# Altium PCB ModbusYoRadio.PcbDoc
Units mm, origin at the board's own origin, x right, y up, seen from the top; angles counter-clockwise.
Board outline 100.08 x 100.05 mm, 2 copper layers (Top Layer, Bottom Layer); 47 components, 34 nets, 178 pads, 34 vias.
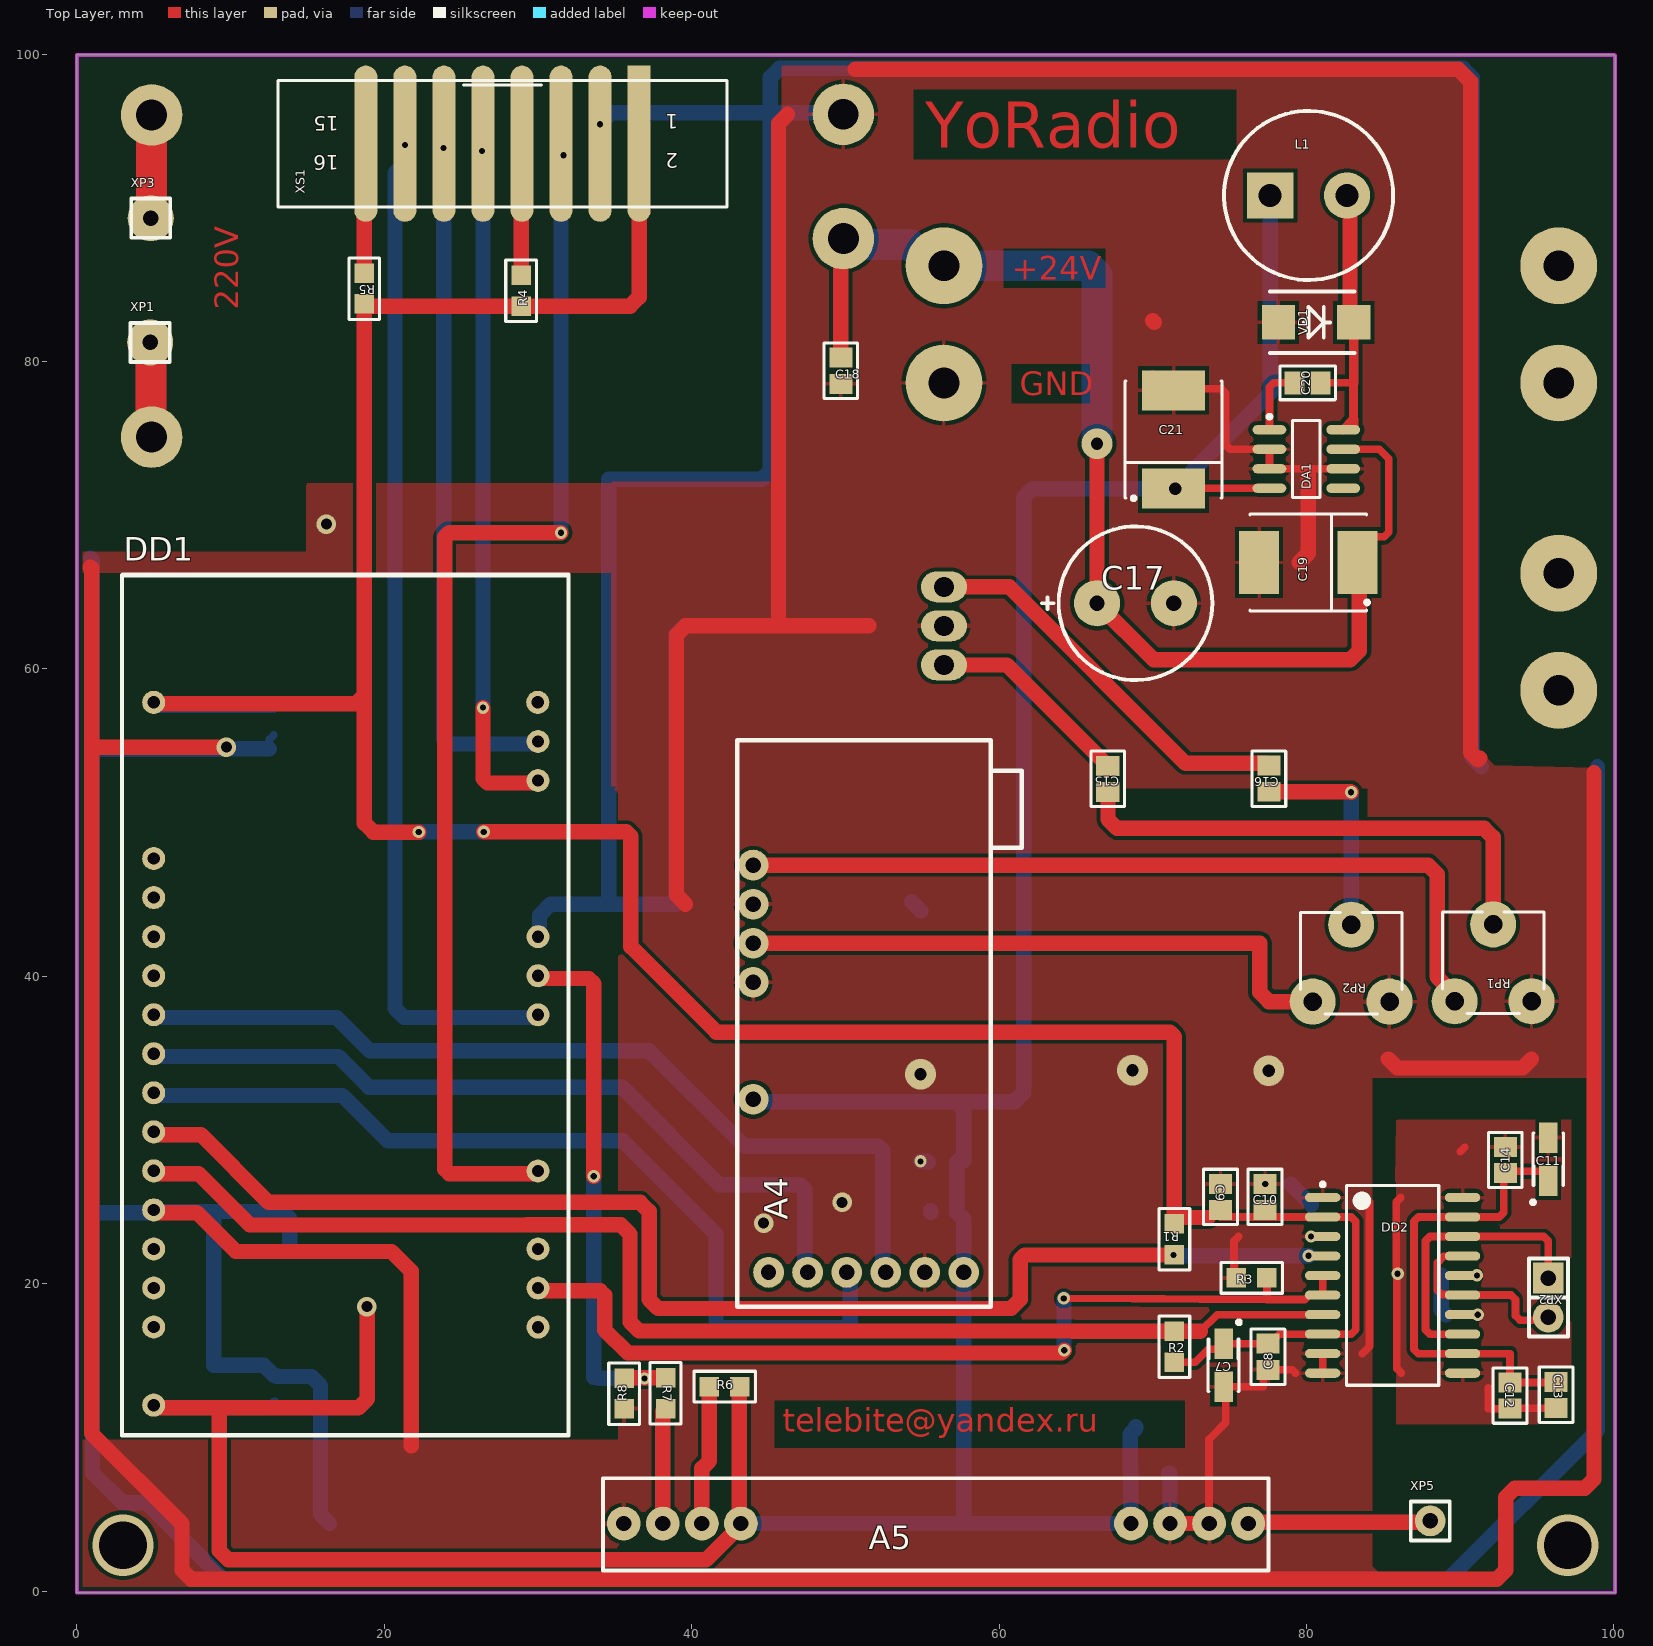
[diagram p0: Top Layer view]
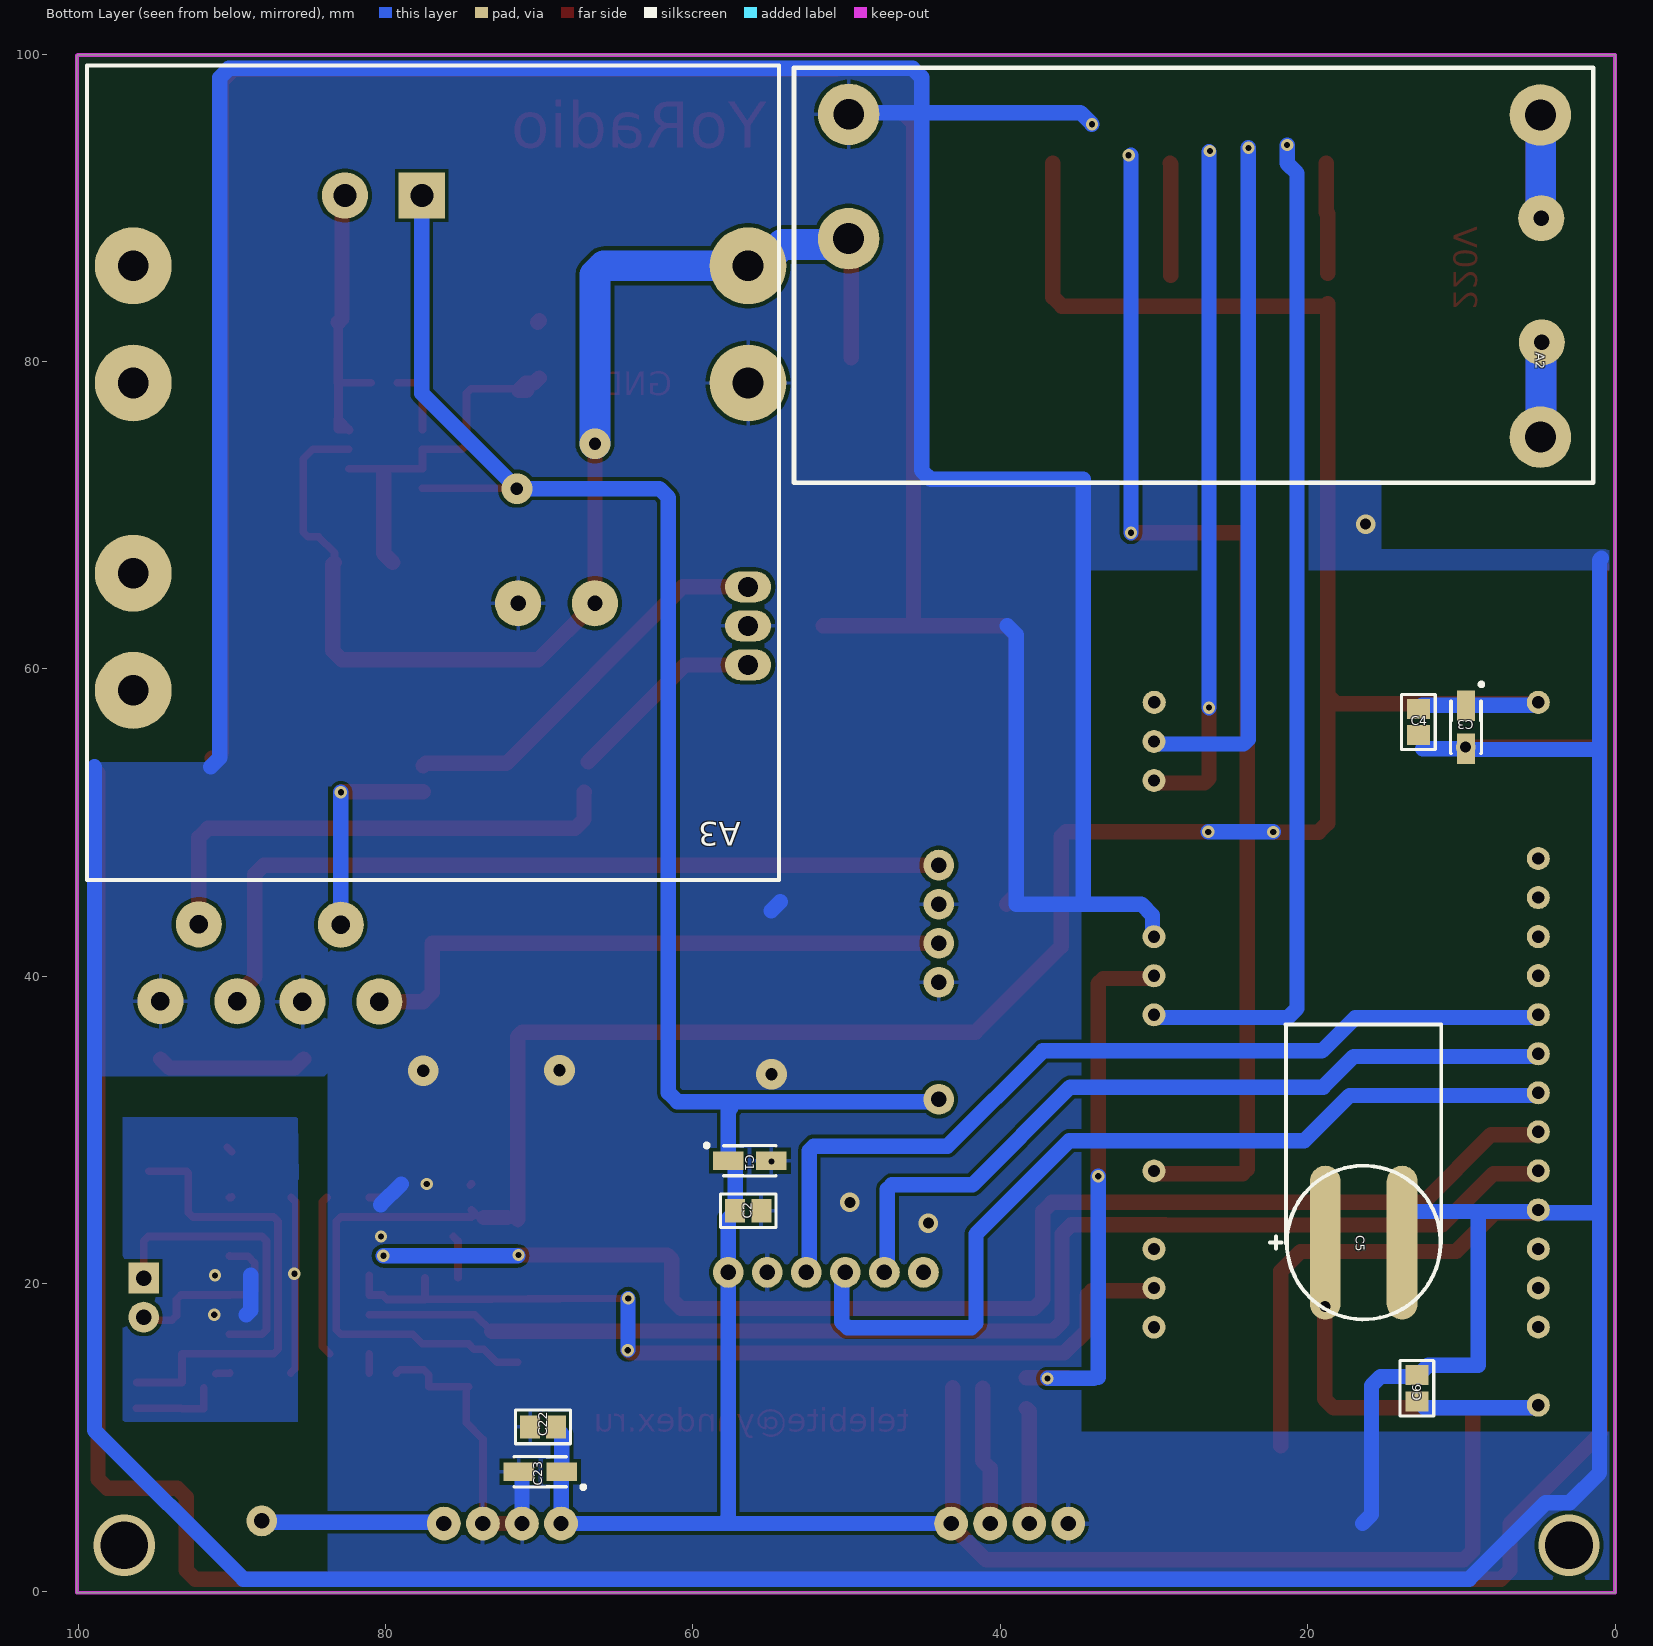
[diagram p1: Bottom Layer view, seen from below]
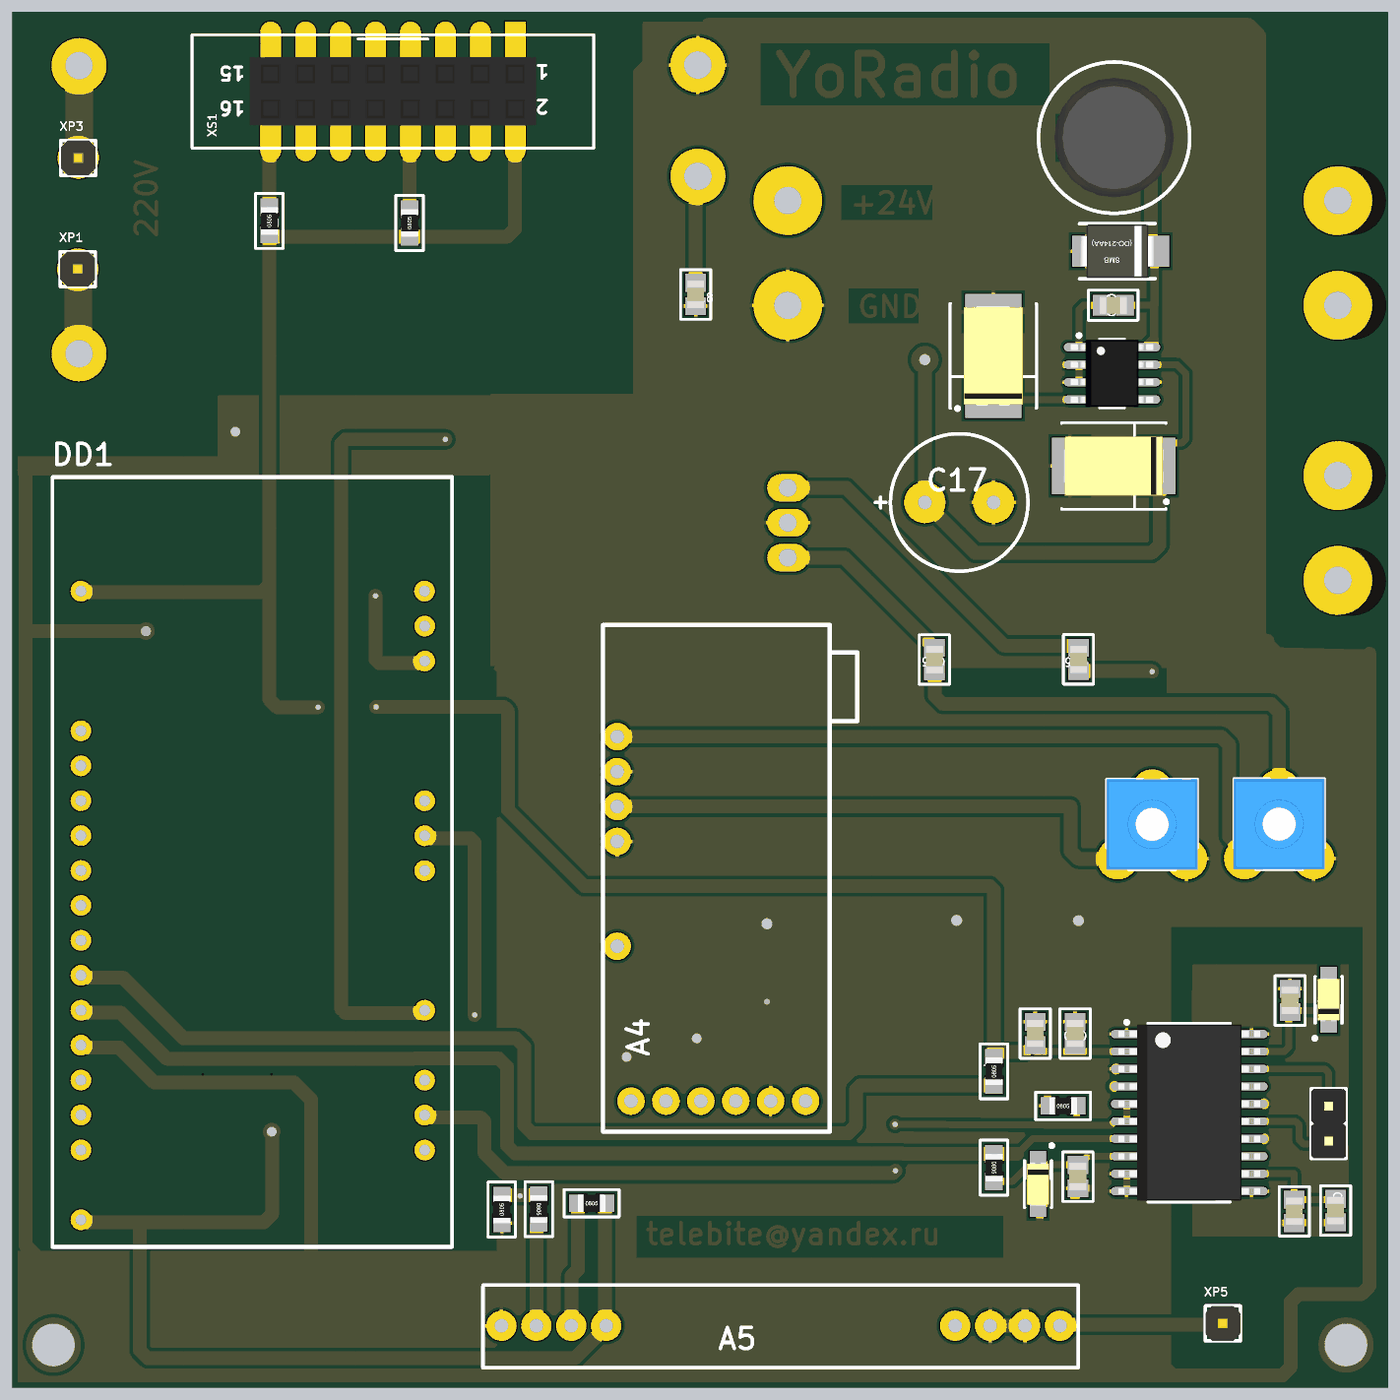
[diagram p2: 3D render of the assembled board from above, using the file's embedded part models]
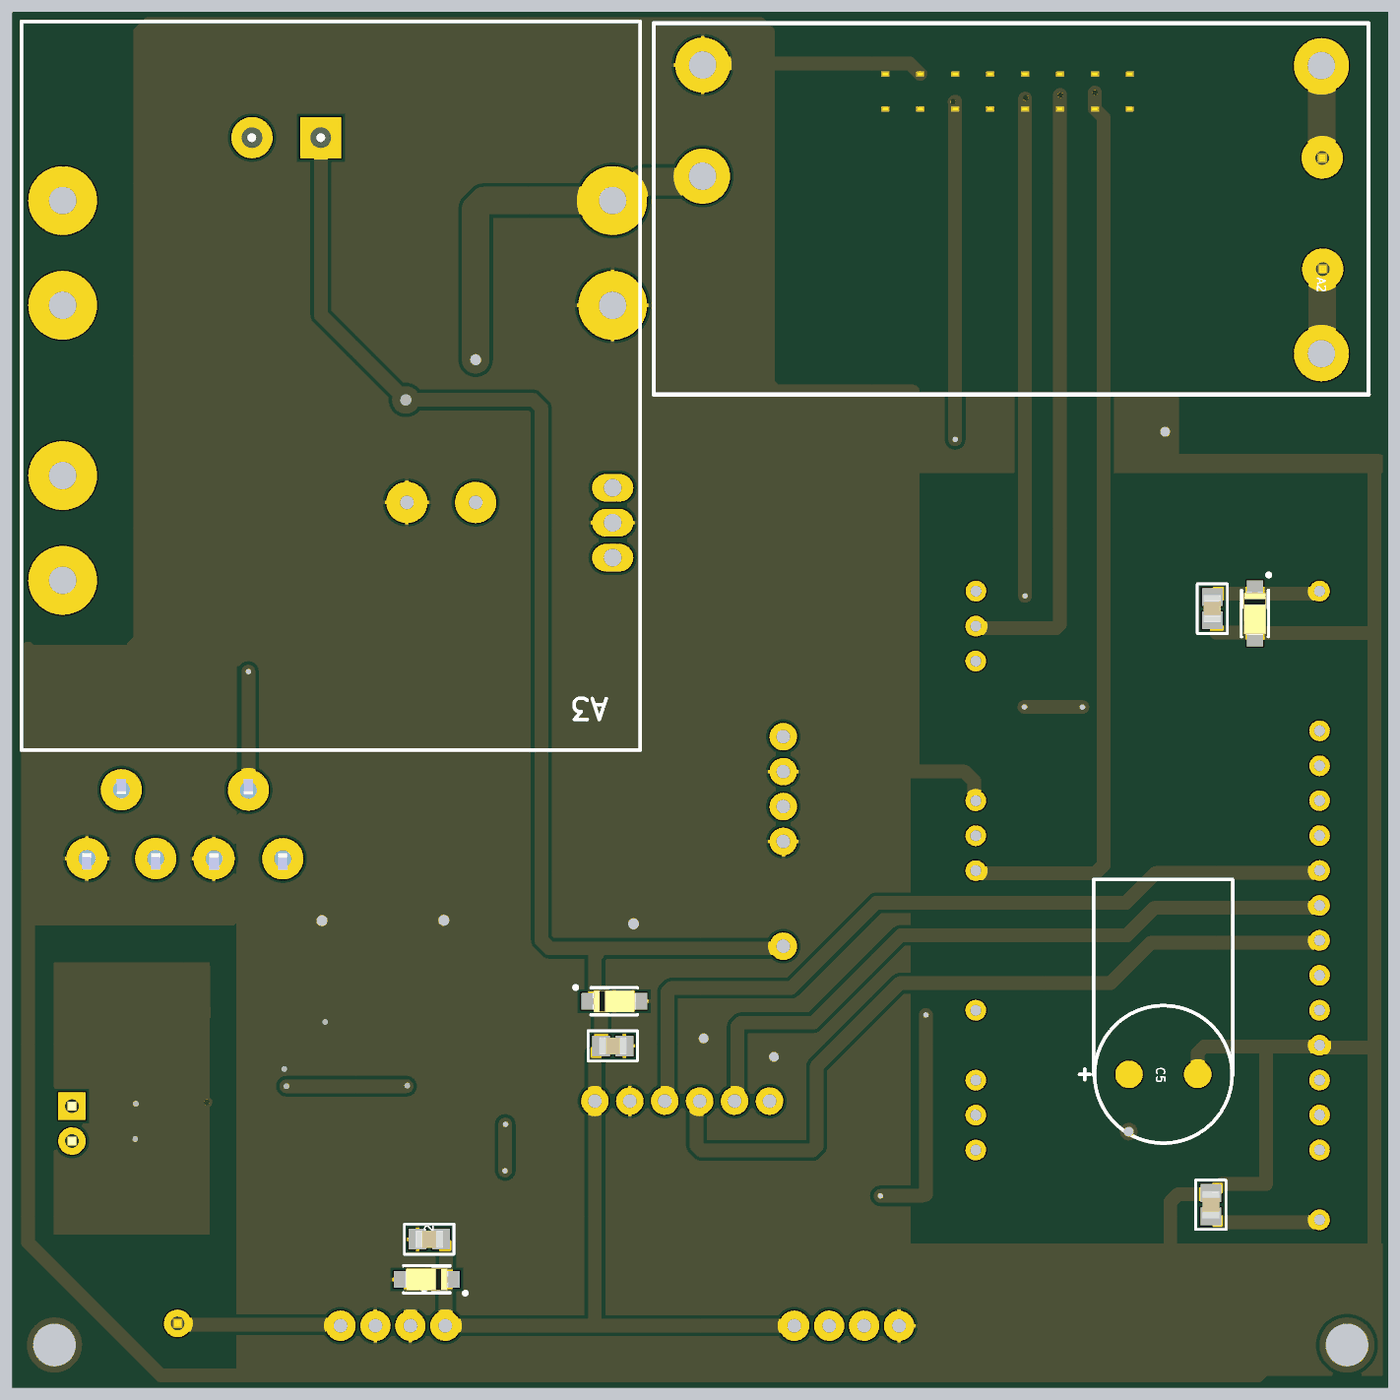
[diagram p3: 3D render of the assembled board from below, using the file's embedded part models]

## Layer stack, top to bottom
Top Solder: solder mask 0.0102, Solder Resist, Dk 3.5
Top Layer: signal copper 0.0356
Dielectric 1: dielectric 0.32, FR-4, Dk 4.8
Bottom Layer: signal copper 0.0356
Bottom Solder: solder mask 0.0102, Solder Resist, Dk 3.5

## Board outline
0,-0.1 0,99.951 100,99.951 100.076,99.9 100.076,-0.1

## Design rules (kind name [scope] priority, off if disabled: settings)
Clearance [All] p1: gap=0.254 ignorepadtopadclearanceinfootprint=FALSE
ComponentClearance [All] p1: gap=0 collisioncheckmode=3 verticalgap=0 showdistances=FALSE donotcheckwithout3dbody=TRUE
HoleSize [All] p1: absolutevalues=TRUE maxlimit=12.7 minlimit=0.3 maxpercent=80.000 minpercent=20.000
PolygonConnect [All] p1: thpad.connectstyle=Relief thpad.reliefconductorwidth=0.254 thpad.reliefentries=4 thpad.polygonreliefangle="90 Angle" thpad.airgapwidth=0.254 smdpad.connectstyle=Relief smdpad.reliefconductorwidth=0.254 smdpad.reliefentries=4 smdpad.polygonreliefangle="90 Angle" smdpad.airgapwidth=0.254 via.connectstyle=Direct via.reliefconductorwidth=0.254 via.reliefentries=4 via.polygonreliefangle="90 Angle" via.airgapwidth=0.254
RoutingCorners [All] p1: cornerstyle=90-Degree minsetback=2.54 maxsetback=2.54
RoutingVias [All] p1: holewidth=0.4 width=0.8 viastyle="Through Hole" minholewidth=0.3 minwidth=0.3 maxholewidth=12.7 maxwidth=50
SolderMaskExpansion [All] p1: expansion=0.102 istentingtop=FALSE
SupplyNets "Schematic Supply Nets" [InNet('GND')] p1: voltage=0.000
Width [All] p1: maxlimit=10 minlimit=0.25 preferedwidth=0.5
27 further rules are at their usual default settings.

## Components (designator, comment, footprint, x,y, rotation, side; value= is the part's Value field where it differs from the comment)
A2 "PWR220" PWR220_1 4.862,75.086 r0 bottom
A3 "UNH" UNH 96.406,66.229 r0 bottom locked
A4 "PCM5102" PCM5102 43.006,55.401 r270 top
A5 "RXB60" RXB60 77.52,7.346 r180 top locked
C1 "100 uF" TC3216-1206-A 56.3,28 r180 bottom
C2 "0.1uF" cap0805 56.4,24.75 r180 bottom
C3 "100 uF" TC3216-1206-A 9.7,56.2 r270 bottom
C4 "0.1uF" cap0805 12.8,56.55 r270 bottom
C5 "470uF" "ECR-EHR 10mm"#1 16.358,22.682 r180 bottom
C6 "0.1uF" cap0805 12.9,13.2 r90 bottom
C7 "6.8uF" TC3216-1206-A 74.6,14.7 r270 top
C8 "0.1uF" cap0805 77.5,15.25 r90 top
C9 "0.1uF" cap0805 74.4,25.65 r270 top
C10 "0.01uF" cap0805 77.3,25.65 r270 top
C11 "6.8uF" TC3216-1206-A 95.732,28.104 r90 top
C12 "0.1uF" cap0805 93.24,12.724 r270 top
C13 "0.1uF" cap0805 96.24,12.774 r270 top
C14 "0.01uF" cap0805 92.932,28.054 r90 top
C15 "2.2uF" cap0805 67.068,52.848 r90 top
C16 "2.2uF" cap0805 77.548,52.861 r90 top
C17 "470uF" "ECR-EHR 10mm"#2 68.872,64.274 r0 top
C18 "0.1uF" cap0805 49.7,79.4 r270 top
C19 "100uF" TC7360-2924-E 80.112,66.928 r180 top
C20 "0.01uF" cap0805 80.073,78.612 r0 top
C21 "100uF" TC7360-2924-E 71.349,74.929 r90 top
C22 "0.1uF" cap0805 69.748,10.693 r180 bottom
C23 "100 uF" TC3216-1206-A 69.926,7.772 r0 bottom
DA1 "LM2675M-5" SO-8 79.985,73.659 r0 top
DD1 "Wrover38" Wrover 4.998,12.105 r0 top
DD2 "ADM2587E" SO-20 85.6,19.9 r0 top
L1 "RLB0914-470KL" RLB0914 80.137,90.804 r0 top
R1 "4.7k" res0805 71.4,22.9 r90 top
R2 "4.7k" res0805 71.4,15.9 r270 top
R3 "1k" res0805 76.425,20.384 r0 top
R4 "100" res0805 28.9,84.6 r90 top
R5 "100" res0805 18.7,84.748 r90 top
R6 "100" res0805 42.139,13.31 r0 top
R7 "2.7k" res0805 38.3,12.884 r270 top
R8 "4.3k" res0805 35.603,12.857 r90 top
RP1 "10k" CA-6V 92.139,40.879 r180 top
RP2 "10k" CA-6V 82.9,40.86 r180 top
VD1 "10BQ060" SMB 80.62,82.549 r0 top
XP1 "PLS-1" PLS1#1 4.767,81.245 r0 top
XP2 "PLS-2" PLS2 95.733,19.101 r180 top
XP3 "PLS-1" PLS1#1 4.804,89.327 r0 top
XP5 "PLS-1" PLS1#2 88.047,4.571 r0 top
XS1 "PBD-16" PBD-16 27.69,94.17 r180 top locked

## Footprints (in the part's own frame and the unit in brackets; to place one, negate y for a bottom-side part, rotate by r counter-clockwise, add the part's x,y. Pads: shape width x height; smd on the part's side, far side on the other; paste and mask are expansions set on the pad)
CA-6V [mm]
  round 3 hole 1.2: 1(2.5,2.5) 2(0,-2.5) 3(-2.5,2.5)
  silkscreen extent -3.3,-3.3 3.3,3.3, body extent -3.3,-3.3 3.3,3.3, height 4.4
cap0805 [mm]
  rect 1.3x1.5 smd: 1(-0.85,0) 2(0.85,0)
  silkscreen extent -1.8,-1.1 1.8,1.1, body extent -1,-0.62 1,0.63, height 0.61
"ECR-EHR 10mm"#1 [mm] "HITANO ECR/EHR capacitor D=10mm"
  oval 2x10 / inner oval 2x10 / far side round 0 all layers, no hole: 1(-2.5,0) 2(2.5,0)
  silkscreen extent -6.1,-5 5,5
"ECR-EHR 10mm"#2 [mm] "HITANO ECR/EHR capacitor D=10mm"
  round 3 hole 1: 1(-2.5,0) 2(2.5,0)
  silkscreen extent -6.1,-5 5,5
PBD-16 [mm]
  rect 1.5x7.62 / inner rect 0x0 / far side rect 0x0 all layers, no hole: 1(-8.89,-1.27)
  oval 1.5x7.62 / inner round 0 / far side round 0 all layers, no hole: 2(-8.89,1.27) 3(-6.35,-1.27) 4(-6.35,1.27) 5(-3.81,-1.27) 6(-3.81,1.27) 7(-1.27,-1.27) 8(-1.27,1.27) 9(1.27,-1.27) 10(1.27,1.27) 11(3.81,-1.27) 12(3.81,1.27) 13(6.35,-1.27) 14(6.35,1.27) 15(8.89,-1.27)
  oval 1.5x7.62 / inner oval 1.5x7.62 / far side round 0 all layers, no hole: 16(8.89,1.27)
  silkscreen extent -14.6,-4.13 14.6,4.13, body extent -10.41,-2.5 10.41,2.5, height 8.5
PCM5102 [mm]
  round 2 hole 1: 1(34.661,14.694) 2(34.661,12.154) 3(34.661,9.614) 4(34.661,7.074) 5(34.661,4.534) 6(34.661,1.994) 7(23.401,0.994) 9(15.781,0.994) 10(13.241,0.994) 11(10.701,0.994) 12(8.161,0.994)
  silkscreen extent 0.03,-0.05 36.88,18.45
PLS1#1 [mm]
  round 3 hole 1: 1(0,0)
  silkscreen extent -1.27,-1.27 1.27,1.27, body extent -1.27,-1.27 1.27,1.27, height 8.44
PLS1#2 [mm]
  round 2 hole 1: 1(0,0)
  silkscreen extent -1.27,-1.27 1.27,1.27, body extent -1.27,-1.27 1.27,1.27, height 8.44
PLS2 [mm]
  rect 2x2 hole 1: 1(0,-1.27)
  round 2 hole 1: 2(0,1.27)
  silkscreen extent -1.27,-2.54 1.27,2.53, body extent -1.27,-2.54 1.27,2.54, height 8.54
PWR220_1 [mm]
  round 4 hole 2: 1(0,0) 2(0,-20.955) 3(45,-20.998) 4(45.008,-12.914)
  silkscreen extent -3.44,-24.04 48.57,2.96
res0805 [mm]
  rect 1.27x1.27 smd: 1(-1,0) 2(1,0)
  silkscreen extent -2,-1 2,1, body extent -1,-0.62 1,0.62, height 0.61
RLB0914 [mm]
  rect 3x3 hole 1.5: 1(-2.5,0)
  round 3 hole 1.5: 2(2.5,0)
  silkscreen extent -5.5,-5.5 5.5,5.5, body extent -4.35,-4.35 4.35,4.35, height 12.3
RXB60 [mm]
  round 2.2 hole 1: 1(1.321,2.946) 2(3.861,2.946) 3(6.401,2.946) 4(8.941,2.946) 5(34.32,2.946) 6(36.86,2.946) 7(39.4,2.946) 8(41.94,2.946)
  silkscreen extent 0,0 43.29,6
SMB [mm]
  rect 2.16x2.26 smd: 1(-2.45,0) 2(2.45,0)
  silkscreen extent -3,-2 2.5,2, body extent -3,-1.95 2.5,1.95, height 2.42
SO-8 [mm] "8-Pin Small Outline Integrated Circuit 1.27 mm Pitch, IPC Medium Density"
  oval 2.2x0.6 smd: 1(-2.4,1.905) 2(-2.4,0.635) 3(-2.4,-0.635) 4(-2.4,-1.905) 5(2.4,-1.905) 6(2.4,-0.635) 7(2.4,0.635) 8(2.4,1.905)
  silkscreen extent -2.52,-2.5 0.9,2.88, body extent -3,-2.45 3,2.45, height 1.6
SO-20 [mm] "20-Pin Small Outline Integrated Circuit (SOIC20), IPC Medium Density"
  oval 2.3x0.6 smd: 1(-4.55,5.715) 2(-4.55,4.445) 3(-4.55,3.175) 4(-4.55,1.905) 5(-4.55,0.635) 6(-4.55,-0.635) 7(-4.55,-1.905) 8(-4.55,-3.175) 9(-4.55,-4.445) 10(-4.55,-5.715) 11(4.55,-5.715) 12(4.55,-4.445) 13(4.55,-3.175) 14(4.55,-1.905) 15(4.55,-0.635) 16(4.55,0.635) 17(4.55,1.905) 18(4.55,3.175) 19(4.55,4.445) 20(4.55,5.715)
  silkscreen extent -4.67,-6.5 3,6.69, body extent -5.15,-6.41 5.16,6.41, height 2.48
TC3216-1206-A [mm] "Capacitor, SM Tantalum; Body 3.2 x 1.6 mm (LxW typ)"
  rect 2x1.2 smd: 1(-1.4,0) 2(1.4,0)
  silkscreen extent -2.93,-1 1.7,1.12, body extent -1.6,-0.8 1.6,0.8, height 1.62
TC7360-2924-E [mm] "Capacitor, SM Tantalum; Body 7.3 x 6.0 mm (LxW typ)"
  rect 2.6x4.1 smd: 1(-3.2,0) 2(3.2,0)
  silkscreen extent -3.95,-3.15 3.8,3.15, body extent -3.65,-2.15 3.65,2.15, height 4.12
UNH [mm]
  oval 3x2 hole 1.3: 1(-40,5.97) 2(-40,3.43) 3(-40,0.89)
  round 5 hole 2: 4(-40,-12.375) 5(-40,-20) 6(0,-20) 7(0,-12.38) 8(0,0) 9(0,7.62)
  silkscreen extent -42,-33.03 3,19.97
Wrover [mm]
  round 1.5 hole 0.8: 1(0,45.72) 5(0,35.56) 6(0,33.02) 7(0,30.48) 8(0,27.94) 9(0,25.4) 10(0,22.86) 11(0,20.32) 12(0,17.78) 13(0,15.24) 14(0,12.7) 15(0,10.16) 16(0,7.62) 17(0,5.08) 19(0,0) 22(25.002,5.075) 23(25.002,7.615) 24(25.002,10.155) 26(25.002,15.235) 30(25.002,25.395) 31(25.002,27.935) 32(25.002,30.475) 36(25.002,40.635) 37(25.002,43.175) 38(24.987,45.72)
  silkscreen extent -2.07,-1.99 26.98,54.04

## Part data
C1 C3 C23: library part capA, "Танталовый конденсатор, SMD", Package="SMD E", Group=Конденсаторы, NPads=2, Part Number=capA, SType=SMD, ValueSCH="100 uF"
C2 C4 C6 C8 C9 C10 C12 C13 C14 C15 C16 C18 C20 C22: library part cap0805, "Керамический конденсатор, SMD", Package="SMD 0805", Group=Конденсаторы, NPads=2, Part Number=cap0805, SType=SMD
  C2 C4 C6 C8 C9 C12 C13 C18 C22: ValueSCH=0.1uF
  C10 C14 C20: ValueSCH=0.01uF
  C15 C16: ValueSCH=2.2uF
C5 C17: library part "ECR/EHR/EXR D=10mm", "Алюминиевый конденсатор Hitano", Package=ECR/HER, Part Number="ECR/EHR/EXR D=10mm", Group=Конденсаторы, NPads=2, SType=TH, ValueSCH=470uF
C7 C11: library part capA, "Танталовый конденсатор, SMD", Package="SMD A", Group=Конденсаторы, NPads=2, Part Number=capA, SType=SMD, ValueSCH=6.8uF
C19 C21: library part capE, "Танталовый конденсатор, SMD", Package="SMD E", Group=Конденсаторы, NPads=2, Part Number=capE, SType=SMD, ValueSCH=100uF
DA1: "Понижающий DC-DC 5V 1А", Package=SO-8, Group=Микросхемы, NPads=8, Part Number=LM2675M-5, SType=SMD, ValueSCH=LM2675M-5
DD2: "Трансивер RS-485 / RS-422", Package=SO-20W, Group=Микросхемы, NPads=20, Part Number=ADM2587E, SType=SMD, ValueSCH=ADM2587E
L1: library part RLB0914-330KL, "Катушка 33 мкГн 1,7 А", Package=RLB0914, Group=Индуктивности, NPads=2, Part Number=RLB0914-330KL, SType=TH, ValueSCH=RLB0914-470KL
R1 R2 R3 R4 R5 R6 R7 R8: library part res0805, "Резистор 0.125 W, SMD", Package="SMD 0805", Group=Резисторы, NPads=2, Part Number=res0805, SType=SMD
  R1 R2: ValueSCH=4.7k
  R3: ValueSCH=1k
  R4 R5 R6: ValueSCH=100
  R7: ValueSCH=2.7k
  R8: ValueSCH=4.3k
RP1 RP2: library part CA-6V, "Резистор переменный", Group=Резисторы, NPads=3, Package=CA-6V, Part Number=CA-6V, SType=TH, ValueSCH=10k
VD1: "Диод шоттки 60V 1A", Package=SMB, Group=Диоды, NPads=2, Part Number=10BQ060, SType=SMD, ValueSCH=10BQ060
XP1 XP3 XP5: "Однорядный штыревой разъем 1 шаг 2.54мм", Group=Разъемы, NPads=1, Part Number=PLS-1, SType=TH, ValueSCH=PLS-1
XP2: "Однорядный штыревой разъем 2 шаг 2.54мм", Group=Разъемы, NPads=2, Part Number=PLS-2, SType=TH, ValueSCH=PLS-2
XS1: "Розетка на плату 8х2 контактов.2,54 х 2,54 мм", Group=Разъемы, NPads=16, Part Number=PBD-16, SType=TH, ValueSCH=PBD-16

## Via types
v1: diameter 0.8, hole 0.4, Top Layer to Bottom Layer, tented both sides, 14 vias
v2: diameter 0.8, hole 0.4, Top Layer to Bottom Layer, 8 vias
v3: diameter 2, hole 0.8, Top Layer to Bottom Layer, tented both sides, 4 vias
v4: diameter 1.27, hole 0.711, Top Layer to Bottom Layer, tented both sides, 4 vias
v5: diameter 4, hole 3.1, Top Layer to Bottom Layer, 2 vias
v6: diameter 1.27, hole 0.711, Top Layer to Bottom Layer, 1 vias
v7: diameter 2, hole 0.8, Top Layer to Bottom Layer, 1 vias

## Nets (pads, with @x,y where several pads share a name; then routed paths per layer and width w, separated by ;. In a path a pad name is that pad's centre, name@x,y a point inside that pad or via, vN(x,y) a via of type N, cw(c..) or ccw(c..) an arc to the next point about the centre after c; other vN are vias at no path point)
2V: R5.2 XS1.15 XS1.16 | length 7.2
  Top Layer w1: R5.2 18.7,89.605 18.8,89.705 XS1.16
3.3V: C3.1 C4.1 C7.1 C8.2 C9.2 C10.2 DD1.1 DD2.2 DD2.8 R1.2 R2.2 R4.1 R5.1 XS1.1 XS1.2 | length 189.3
  Top Layer w0.5: v1@22.231,49.378 v1(22.244,49.39) ; R2.2 72.761,14.9 73.609,15.748 74.25,15.748 74.6,16.098 C7.1 C8.2 77.6,16.1 78.225,16.725 82.918,16.725 83.21,17.018 83.21,24.052 82.918,24.345 77.3,24.345 C9.2@74.4,24.345 ; R1.2 71.4,24.181 71.504,24.285 72.055,24.285 72.078,24.308 ; 73.607,24.308 73.699,24.4 74,24.4 C9.2
  Top Layer w1: DD1.1@4.998,57.645 5.087,57.734 18.114,57.734 18.7,58.32 ; v1@22.231,49.378 19.286,49.378 18.7,49.963 18.7,58.32 ; v1(26.467,49.403) 35.75,49.403 36.043,49.11 36.043,41.935 41.605,36.373 71.107,36.373 71.4,36.08 R1.2@71.4,24.181 ; XS1.2 36.576,92.896 36.576,84.186 35.99,83.6 R4.1 18.848,83.6 R5.1 18.7,58.32 ; 72.078,24.308 73.607,24.308
  Bottom Layer w0.5: C4.1@12.555,57.645 C4.1 ; v1(22.244,49.39) v1@22.25,49.397 ; v1@26.46,49.397 v1(26.467,49.403)
  Bottom Layer w1: DD1.1@4.998,57.645 C4.1@12.555,57.645 ; v1@22.25,49.397 v1@26.46,49.397
3V: R4.2 XS1.7 XS1.8 | length 7.3
  Top Layer w1: R4.2 28.9,92.84 XS1.8
5V: A4.1 A4.7 A5.4 A5.5 C1.1 C2.1 C5.1 C6.1 C21.1 C22.2 C23.1 DA1.4 DD1.19 L1.1 R6.2 | length 235.8
  Top Layer w0.5: C21.1 71.374,71.754 DA1.4
  Top Layer w0.75: L1.1@77.618,90.785 L1.1
  Top Layer w1: DD1.19@4.998,11.925 18.312,11.925 18.898,12.511 18.898,18.491 v6(18.872,18.517) ; 9.271,11.811 9.271,2.621 9.857,2.035 40.917,2.035 43.2,4.318 A5.5 43.1,4.5 R6.2@43.1,13.233
  Bottom Layer w0.5: C6.1@12.375,11.925 12.8,12.35 C6.1
  Bottom Layer w1: DD1.19@4.998,11.925 C6.1@12.375,11.925 ; A5.5 58.039,4.4 ; A4.7 44.153,31.847 61.009,31.847 61.595,32.433 61.595,71.144 62.181,71.73 v7(71.45,71.73) 77.637,77.916 L1.1 ; 57.516,31.445 57.7,31.261 C1.1 57.35,28 57.25,27.9 C2.1 57.25,24.65 57.7,24.2 A4.1 57.7,4.739 58.039,4.4 ; C22.2 68.898,10.593 68.526,10.221 C23.1 68.553,7.746 68.553,4.427 A5.4 58.039,4.4
24V: A2.4 A3.5 C17.1 C18.1 C19.1 DA1.7 | length 83.3
  Top Layer w0.5: DA1.7 84.721,74.294 85.344,73.671 85.344,68.892 85.051,68.599 84.362,68.599 83.312,67.549 C19.1
  Top Layer w1: C18.1 49.7,87.83 A2.4 ; A3.5@55.591,86.229 A3.5 ; v3(66.372,74.652) C17.1 70.042,60.604 82.853,60.604 83.439,61.19 83.439,66.8 C19.1
  Bottom Layer w2: A2.4 50.253,87.617 54.206,87.617 55.594,86.229 A3.5 65.786,86.229 66.372,85.644 v3(66.372,74.652)
BCK: A4.5 DD1.10 | length 51.4
  Bottom Layer w1: DD1.10@4.998,34.785 17.005,34.785 18.999,32.791 35.458,32.791 41.808,26.441 47.053,26.441 47.346,26.149 47.346,20.934 A4.5
CS: DD1.26 XS1.5 XS1.6 | length 79.6
  Top Layer w0.5: 23.927,27.445 24.22,27.153 ; DD1.26@29.993,27.153 DD1.26@30,27.16
  Top Layer w1: 23.927,27.445 23.927,68.571 24.22,68.863 v1(31.5,68.863) ; 24.22,27.153 DD1.26@29.993,27.153
  Bottom Layer w1: v1(31.5,68.863) v2@31.5,93.421
  other v2: 31.648,93.421
Dat: DD1.31 R7.1 R8.2 | length 35.1
  Top Layer w1: DD1.31@30,39.86 33.292,39.86 33.63,39.522 v1(33.63,27) ; R8.2 35.63,13.884 R7.1
  Bottom Layer w1: 33.63,13.919 v1(33.63,27) ; 33.922,13.843 v1(36.932,13.843)
DC: DD1.36 XS1.9 XS1.10 | length 44.6
  Top Layer w1: v1(26.42,57.484) 26.42,52.871 26.713,52.578 29.982,52.578 DD1.36@30,52.56
  Bottom Layer w0.5: v2(26.365,93.701) v2@26.42,93.646
  Bottom Layer w1: v1(26.42,57.484) v2@26.42,93.646
DIN: A4.4 DD1.11 | length 58.4
  Bottom Layer w1: DD1.11@4.998,32.245 17.285,32.245 20.218,29.312 35.509,29.312 41.58,23.241 41.58,17.438 41.873,17.145 49.936,17.145 50.317,17.526 50.317,20.503 A4.4
Dir: DD1.23 DD2.5 DD2.6 R3.2 | length 60.3
  Top Layer w0.5: v1(64.203,19.05) 77.419,18.981 ; R3.2 77.425,18.988 77.419,18.981 ; DD2.5 DD2.6 80.173,19.265 79.882,18.974 79.731,18.974 79.728,18.976 78.385,18.976 77.419,18.981
  Top Layer w1: DD1.23@30,19.54 34.048,19.54 34.341,19.247 34.341,16.993 35.839,15.494 64.059,15.494 v1(64.237,15.672)
  Bottom Layer w0.5: v1(64.203,19.05) v1@64.22,19.033 ; v1@64.22,15.688 v1(64.237,15.672)
  Bottom Layer w1: v1@64.22,15.688 v1@64.22,19.033
GND: A2.3 A3.2 A3.4 A4.2 A4.9 A4.11 A5.2 A5.3 A5.8 C1.2 C2.2 C3.2 C4.2 C5.2 C6.2 C7.2 C8.1 C9.1 C10.1 C17.2 C18.2 C19.2 C21.2 C22.1 C23.2 DA1.2 DA1.3 DA1.6 DD1.14 DD1.32 DD2.1 DD2.3 DD2.9 DD2.10 R3.1 R8.1 RP1.3 RP2.3 VD1.1 XS1.3 XS1.4 | length 936.1
  Top Layer w0.5: 0.965,54.839 1.041,54.915 ; C21.2 71.451,78.231 74.434,78.231 74.727,77.938 74.727,74.587 75.02,74.294 DA1.2 DA1.3 DA1.6 ; A5.2 73.659,9.88 74.752,10.973 74.752,13.148 C7.2 77.177,13.3 77.177,14.077 C8.1 79.072,14.4 79.287,14.185 ; C9.1 C9.1@74.484,26.416 ; R3.1@75.286,20.384 75.286,22.782 75.578,23.075 ; DD2.1@80.223,25.661 80.269,25.615 DD2.1 ; DD2.10 DD2.9 ; 83.629,15.455 84.099,15.926 84.099,25.322 83.807,25.615
  Top Layer w1: 0.881,66.624 0.965,66.54 0.965,54.839 0.965,10.262 6.839,4.388 6.839,1.367 7.425,0.781 92.378,0.781 92.964,1.367 92.964,6.12 93.55,6.706 98.119,6.706 98.704,7.291 98.704,53.264 ; 1.041,54.915 v4(9.728,54.915) ; DD1.14@4.998,24.625 7.81,24.625 10.338,22.098 20.472,22.098 21.742,20.828 21.742,9.449 ; 39.6,44.7 39.014,45.286 39.014,62.214 39.6,62.799 51.538,62.799 ; 45.644,63.298 45.644,95.498 46.23,96.084 ; A2.3 A2.3@50.436,96.658 ; 50.632,99.009 89.891,99.009 90.678,98.222 90.678,54.559 91.161,54.077 91.288,54.204 ; v3(54.889,33.63) v3@55.081,33.821 ; A3.4@56.351,78.55 A3.4 ; C21.2@70,78.929 70.324,78.605 70.873,78.605 C21.2 C21.2@70.8,78.129 ; 70,82.652 70.103,82.549 ; A5.3 A5.2 ; v3@77.318,33.45 v3@77.903,34.036 ; 79.526,66.928 80.112,67.514 80.112,72.72 ; 85.319,34.622 85.904,34.036 94.053,34.036 94.639,34.622 ; RP2.3@85.319,38.279 RP2.3
  Bottom Layer w0.5: C3.2@9.662,54.762 C3.2 ; 12.507,54.8 12.507,55.407 C4.2 ; C6.2@12.8,14.05 C6.2 ; v1(80.288,23.075) v1@80.315,23.102
  Bottom Layer w1: 0.889,67.208 1.016,67.081 1.016,54.762 ; DD1.14@4.998,24.625 1.016,24.625 ; DD1.14@5.073,24.7 13.396,24.7 13.858,24.238 C5.2 ; 8.9,24.407 8.9,14.7 12.15,14.7 C6.2@12.8,14.05 ; C3.2@9.662,54.762 1.016,54.762 ; C3.2 12.507,54.8 ; C6.2 12.98,13.97 15.264,13.97 15.85,13.384 15.85,4.986 16.435,4.4 ; DD1.32@30.099,42.499 30.099,43.973 30.826,44.7 34.671,44.7 ; v1(34.04,95.44) 34.794,96.194 45.11,96.194 ; 39.541,62.799 38.955,62.214 38.955,44.7 34.671,44.7 ; A4.9 A4.9@44.021,39.599 ; A4.11 A4.11@44.153,44.853 ; A2.3 49.752,96.194 45.11,96.194 ; 54.304,44.856 54.889,44.271 ; v1(54.889,27.965) 55.335,27.965 C1.2@55.4,27.9 ; C2.2@55.55,24.65 C2.2 ; C23.2@71.026,7.672 71.119,7.672 A5.3 ; v3@77.521,33.884 v3(77.546,33.858) ; 78.969,26.492 80.315,25.146 ; 91.365,53.645 90.78,54.231 90.78,98.476 90.186,99.07 45.696,99.07 45.11,98.484 45.11,96.194 ; 98.933,53.645 98.933,10.465 89.249,0.781 9.5,0.781 4.527,5.754 2.958,5.754 1.016,7.696 1.016,24.625 ; 1.016,24.625 1.016,54.762 ; 34.671,44.7 34.595,44.776 34.595,72.339 44.525,72.339 45.11,72.925 45.11,96.194
  other v1: 77.318,26.492
  other v3: 68.682,33.884
  other v4: 44.679,23.952 49.784,25.298 16.231,69.418
InL: A4.12 RP1.1 | length 53.5
  Top Layer w1: A4.12 87.908,47.24 88.494,46.654 88.494,39.965 89.639,38.82 RP1.1
InR: A4.10 RP2.1 | length 39.9
  Top Layer w1: A4.10 76.963,42.16 ; 76.962,42.159 76.962,38.946 77.548,38.36 RP2.1
LCK: A4.3 DD1.9 | length 59
  Bottom Layer w1: DD1.9@4.998,37.325 16.904,37.325 19.075,35.154 37.236,35.154 43.434,28.956 52.133,28.956 52.426,28.663 52.426,20.934 A4.3
MOSI: DD1.37 XS1.11 XS1.12 | length 44.7
  Bottom Layer w0.5: DD1.37@29.982,55.118 DD1.37@30,55.1
  Bottom Layer w1: v2@23.88,93.904 23.88,55.411 24.173,55.118 DD1.37@29.982,55.118
  other v2: 23.851,93.904
NetA2_1: A2.1 XP1.1 | length 12.4
  Top Layer w2: XP1.1 4.814,81.197 4.814,75.133 A2.1
  Bottom Layer w2: XP1.1 4.814,81.197 4.814,75.133 A2.1
NetA2_2: A2.2 XP3.1 | length 13.5
  Top Layer w2: XP3.1 4.862,89.385 A2.2
  Bottom Layer w1: XP3.1 XP3.1@4.833,89.356 ; A2.2@4.833,96.012 A2.2
  Bottom Layer w2: XP3.1@4.833,89.356 A2.2@4.833,96.012
NetA3_1: A3.1 C15.2 | length 13
  Top Layer w1: A3.1 60.507,60.259 C15.2@66.818,53.948
NetA3_3: A3.3 C16.2 | length 26
  Top Layer w1: A3.3 60.661,65.339 72.139,53.861 77.398,53.861 C16.2
NetA5_1: A5.1 XP5.1 | length 23.8
  Top Layer w1: A5.1 76.285,4.486 87.961,4.486 XP5.1
  Bottom Layer w1: A5.1 76.285,4.486 87.961,4.486 XP5.1
NetA5_6: A5.6 R6.1 | length 9
  Top Layer w1: A5.6 40.66,7.996 41.148,8.484 R6.1@41.148,13.208
NetA5_7: A5.7 R7.2 | length 7.4
  Top Layer w1: A5.7@38.12,4.597 38.12,11.704 R7.2
NetC11_1: C11.1 C12.1 C13.1 C14.1 DD2.12 DD2.19 | length 30.5
  Top Layer w0.5: C14.1@92.837,27.204 92.837,24.638 92.544,24.345 DD2.19 87.281,24.345 86.988,24.052 86.988,15.748 87.281,15.455 DD2.12 93.24,15.455 ; C14.1@92.932,27.33 C11.1@95.382,27.33 ; 93.24,15.371 C12.1 C13.1@96.19,13.574
NetC11_2: C11.2 C12.2 C13.2 C14.2 DD2.11 DD2.14 DD2.16 DD2.20 | length 21.7
  Top Layer w0.5: 86.119,25.615 85.827,25.322 85.827,20.964 85.871,20.92 85.871,20.708 v1(85.928,20.65) 85.877,20.599 85.877,14.491 86.17,14.199 ; DD2.20@90,25.661 90.046,25.615 DD2.20 ; 90,28.587 90.293,28.88 ; DD2.11@90.136,14.199 DD2.11 90.973,14.185 DD2.11@91.019,14.139 ; 91.821,13.233 91.821,11.875 93.256,11.875 93.28,11.899 C13.2@96.215,11.899
  Bottom Layer w0.5: v1(85.928,20.65) v1@85.986,20.593
  Bottom Layer w1: 88.773,20.549 88.773,18.276 89.066,17.983
  other v2: 91.135,17.983 91.084,20.549
NetC15_1: C15.1 RP1.2 | length 33
  Top Layer w1: C15.1 67.081,51.985 67.081,50.217 67.667,49.632 91.553,49.632 92.139,49.046 RP1.2
NetC16_1: C16.1 RP2.2 | length 14
  Top Layer w1: C16.1 82.863,52.011 v1(82.9,51.974)
  Bottom Layer w1: RP2.2 v1(82.9,51.974)
NetC20_1: C20.1 DA1.1 | length 4.5
  Top Layer w0.5: DA1.1 77.585,78.319 77.877,78.612 C20.1
NetC20_2: C20.2 DA1.8 L1.2 VD1.2 | length 19.2
  Top Layer w0.5: C20.2 83.058,78.612 ; DA1.8 83.023,75.564 DA1.8@83.07,75.61
  Top Layer w0.6: DA1.8 83.058,76.237 83.058,78.612 ; DA1.8@83.07,75.61 83.07,76.237 ; 83.07,78.612 VD1.2
  Top Layer w1: L1.2 82.828,90.612 82.828,82.79 VD1.2
RA: DD2.13 DD2.18 XP2.1 | length 19
  Top Layer w0.5: DD2.13 88.035,16.725 87.742,17.018 87.742,22.782 88.035,23.075 DD2.18 95.44,23.075 95.733,22.782 XP2.1@95.733,20.296
RB: DD2.15 DD2.17 XP2.2 | length 12.3
  Top Layer w0.5: DD2.17 90.131,21.786 88.933,21.786 88.496,21.348 88.496,19.591 88.789,19.298 89.197,19.298 89.21,19.284 90.131,19.284 DD2.15 93.306,19.265 93.599,18.972 93.599,17.92 93.892,17.628 XP2.2@95.809,17.628
RX: DD1.12 DD2.4 R1.1 | length 86.2
  Top Layer w1: DD1.12@4.998,29.705 8.064,29.705 12.471,25.298 36.651,25.298 37.236,24.713 37.236,18.975 37.822,18.39 60.781,18.39 61.366,18.975 61.366,21.577 61.659,21.869 v2(71.349,21.869)
  Bottom Layer w0.5: v2(71.349,21.869) v2@71.399,21.819
  Bottom Layer w1: v2@71.399,21.819 v2(80.137,21.819)
SCK: DD1.30 XS1.13 XS1.14 | length 66
  Bottom Layer w1: v2@21.34,94.082 XS1.14 20.693,92.253 20.693,37.906 21.279,37.32 DD1.30@30,37.32
  other v2: 21.336,94.082
TX: DD1.13 DD2.7 R2.1 | length 84.1
  Top Layer w0.5: 73.087,16.9 74.182,17.995 DD2.7
  Top Layer w1: DD1.13@4.998,27.165 7.912,27.165 11.252,23.825 29.265,23.825 29.273,23.834 35.388,23.834 35.982,23.239 35.982,17.512 36.568,16.926 64.756,16.926 64.782,16.9 73.087,16.9
pads on no net: A3.6 A3.7 A3.8 A3.9 A4.6 DA1.5 DD1.5 DD1.6 DD1.7 DD1.8 DD1.15 DD1.16 DD1.17 DD1.22 DD1.24 DD1.38
copper on no net:
  other v5: 3,3 97,3

## Polygon pours and split planes (outlines as drawn)
GND on Top Layer "GND_L01_P003" (solid, pour order 3): 35.23,9.804 35.179,9.855 0.152,9.855 0.152,0.533 -0.102,0.279 -0.025,0.203 35.662,0.203
GND on Top Layer "GND_L01_P000" (solid, remove dead copper, pour order 0): 45.745,99.238 45.847,99.136 45.847,52.222 93.726,52.222 90.399,55.55 90.399,99.238
GND on Top Layer "GND_L01_P007" (solid, pour order 7): 83.973,53.924 83.973,33.629 84.201,33.401 98.73,33.401 98.73,53.569
GND on Top Layer "GND_L01_P006" (solid, remove dead copper, pour order 6): 34.773,52.375 35.23,51.918 35.23,1.067 84.836,1.067 84.277,1.626 84.277,52.908
NetC11_2 on Top Layer "NETC11_2_L01_P005" (solid, pour order 5): 85.776,26.645 85.827,26.594 85.827,10.871 97.104,10.871 97.206,10.973 97.206,30.683 85.928,30.683 85.827,30.785
GND on Top Layer "GND_L01_P004" (solid, pour order 4): 34.773,72.085 14.808,72.085 14.935,71.958 14.935,67.615 0.025,67.615 0.102,67.539 0.102,66.243 34.874,66.243
GND on Top Layer "GND_L01_P001" (solid, pour order 1): 34.671,72.187 34.773,72.085 34.773,52.375 46.152,52.375 45.847,52.68 45.847,72.187
GND on Bottom Layer "GND_L02_P009" (solid, remove dead copper, pour order 9): 34.265,52.591 34.722,52.133 34.722,0.965 83.769,0.965 83.769,1.841 83.769,53.124
GND on Bottom Layer "GND_L02_P014" (solid, remove dead copper, pour order 14): 35.065,72.263 15.1,72.263 15.227,72.136 15.227,67.793 0.318,67.793 0.394,67.716 0.394,66.421 35.166,66.421
GND on Bottom Layer "GND_L02_P013" (solid, pour order 13): 35.217,10.338 35.166,10.389 0.14,10.389 0.14,1.067 -0.114,0.813 -0.038,0.737 35.649,0.737
GND on Bottom Layer "GND_L02_P012" (solid, pour order 12): 34.747,71.958 34.849,71.857 34.849,52.146 46.228,52.146 45.923,52.451 45.923,71.958
NetC11_2 on Bottom Layer "NETC11_2_L02_P011" (solid, pour order 11): 85.649,26.784 85.7,26.733 85.7,11.011 96.977,11.011 97.079,11.112 97.079,30.823 85.801,30.823 85.7,30.924
GND on Bottom Layer "GND_L02_P010" (solid, pour order 10): 83.744,53.924 83.744,33.723 83.972,33.495 98.501,33.495 98.501,53.924
GND on Bottom Layer "GND_L02_P008" (solid, remove dead copper, pour order 8): 44.806,98.933 44.806,52.375 93.269,52.375 90.399,55.245 90.399,98.933

## Keep-outs
Keep-Out Layer:
  lines w0.254: 0,99.9 0,-0.1 100,-0.1 ; 0,99.951 100,99.951 ; 100.076,-0.1 100.076,99.9

## Other copper
Top Layer:
  text "YoRadio" at 55.186,93.921 h3
  text "+24V" at 60.808,85.319 h1.52
  text "220V" at 10.49,83.363 h1.52 r90
  text "GND" at 61.341,77.8 h1.52
  text "telebite@yandex.ru" at 45.923,10.363 h1.52

## Silkscreen, mask and mechanical layers (free items; w line width, h text height)
Bottom Overlay:
  lines w0.254: 11.314,22.606 11.314,36.83 ; 11.328,36.855 21.438,36.855 ; 21.423,22.606 21.423,36.83
Top Solder:
  lines w5: 96.406,58.533 97.409,58.533 ; 96.406,66.229 97.409,66.229 ; 96.406,86.219 97.409,86.219 ; 96.431,78.599 97.434,78.599

## Text inside footprints (layer, text, board x,y; h text height)
XS1: Top Overlay "1" at 39.12,96.075 h0.95 r180; Top Overlay "2" at 39.12,93.535 h0.95 r180; Top Overlay "15" at 17.022,95.948 h0.95 r180; Top Overlay "16" at 17.022,93.408 h0.95 r180